# EAGLE board [test] V3.0_2021-01-11_10-16-39.pcb (EAGLE 9.6.2)
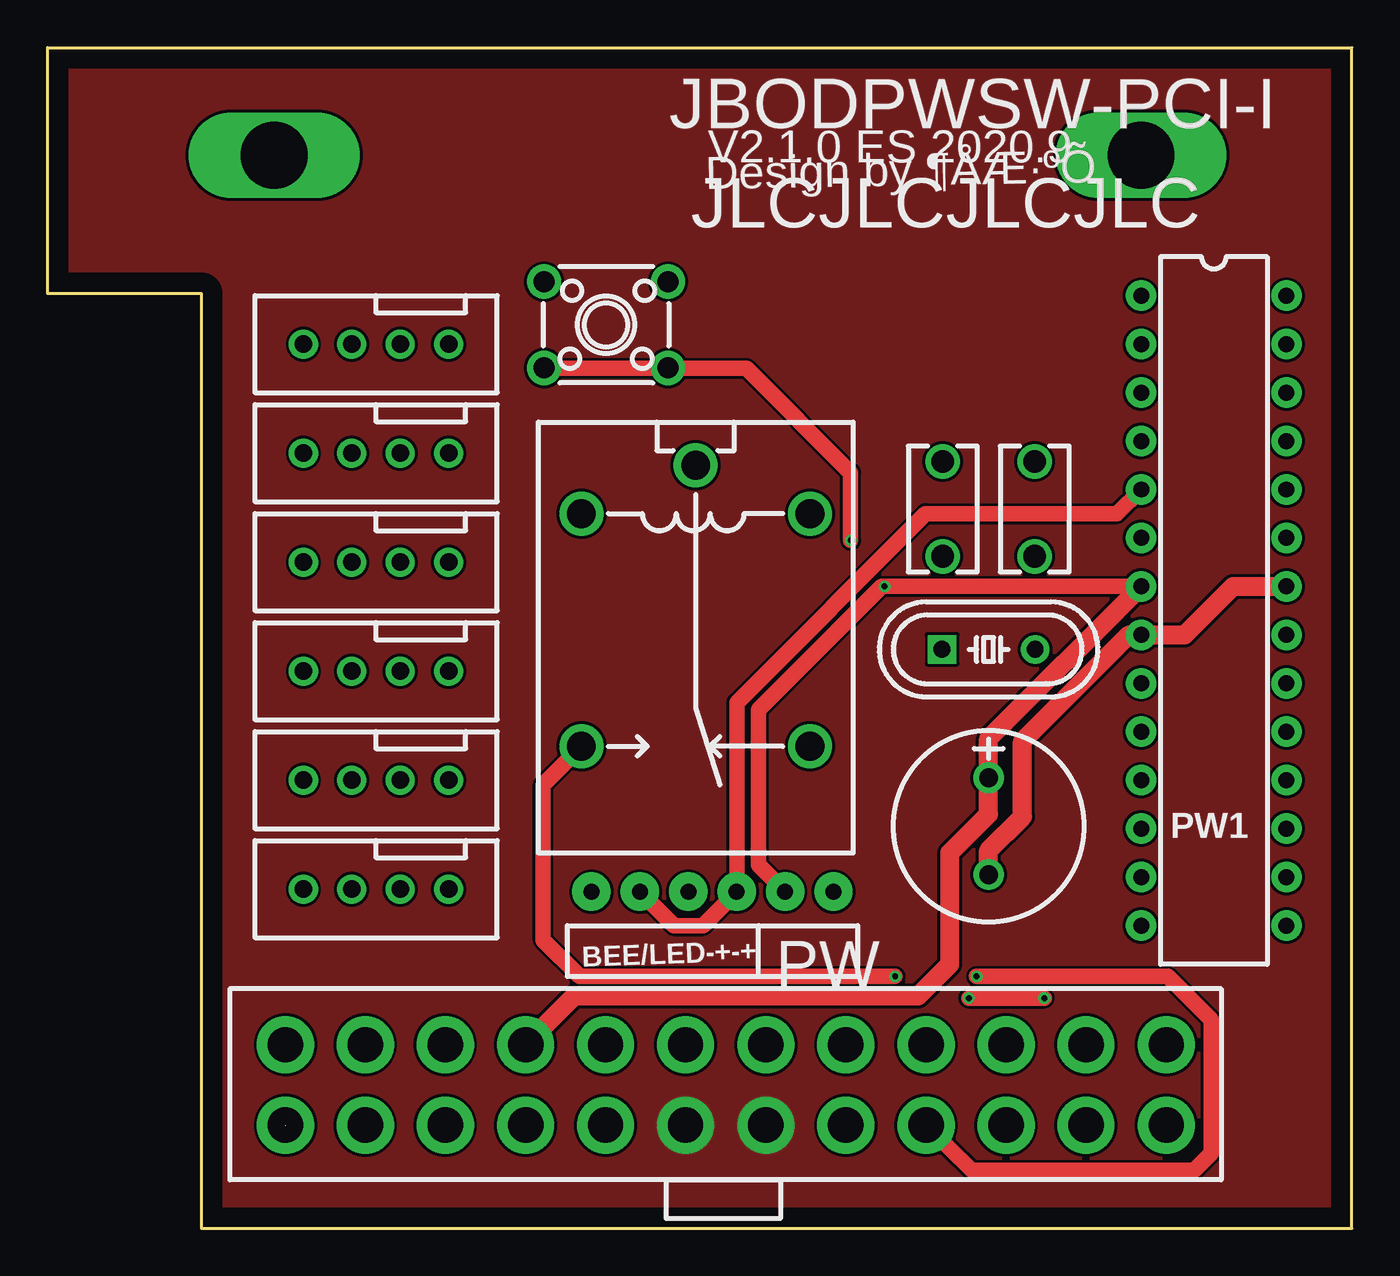
[diagram p0: board, top side]
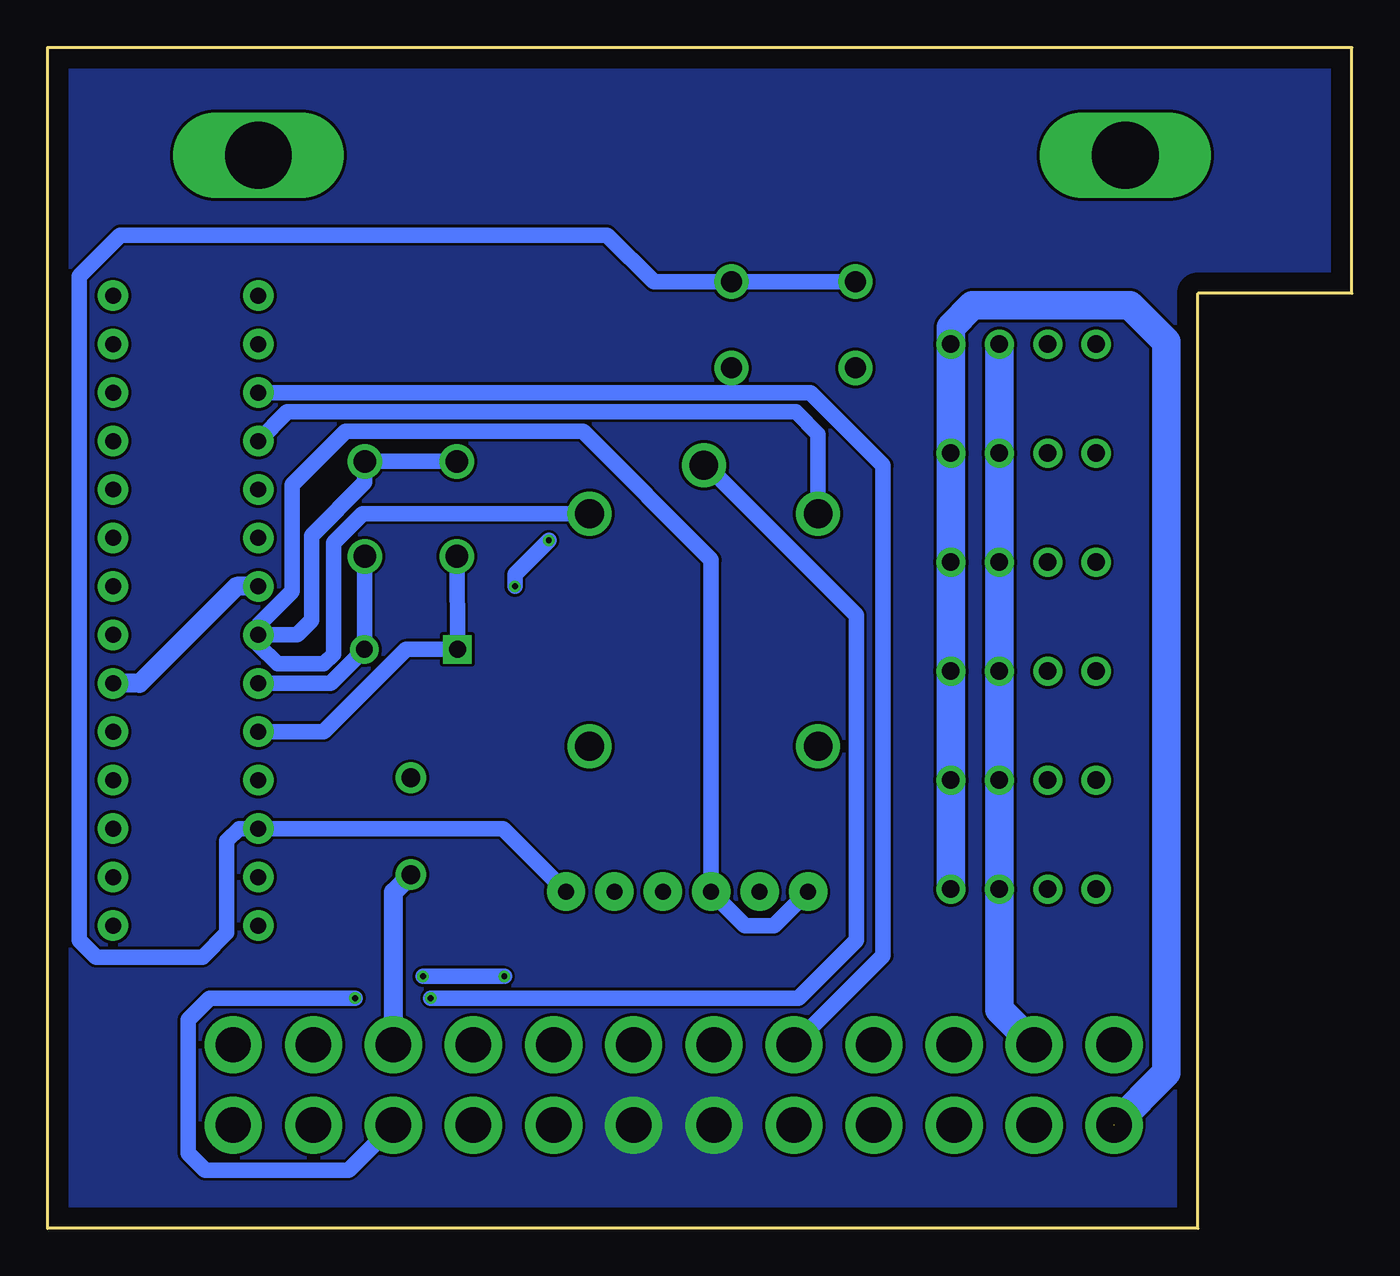
[diagram p1: board, bottom side, seen from below]

Size 68.4 x 61.9 mm. Coordinates in mm from the lower left corner, seen from the top.
Outline: 0,49.02 8.08,49.02 8.08,0 68.4,0 68.4,61.9 0,61.9 0,49.02
Copper layers (1*16): Top 0.035mm / dielectric 1.5mm / Bottom 0.035mm
Design rules "V3.0_2021-01-11_10-16-39": minimum track width 6mil, minimum drill 0.35mm, track to track 6mil, track to pad 6mil, pad to pad 6mil, via to via 6mil, smd to smd 6mil, copper to edge 40mil, drill to drill 6mil, minimum pad ring 0mil, minimum via ring 0mil, stop-mask expansion 4mil, vias tented up to drill 0mil, thermal gap 10mil

## Footprints (pad centres in the part's own frame; a part is rotated, then mirrored left to right if it is on the bottom)
HC-49US_L11.5-W4.5-P4.88_1PRIMARY = drill 0.889 pad 1.499 square: 1 -2.438,0 | drill 0.889 pad 1.499: 2 2.438,0
CAP-TH_L6.5-W3.5-P5.00-D1.2_1PRIMARY = drill 1.194 pad 1.803: 1 -2.489,0; 2 2.489,0
ATX-24PIN_1_1PRIMARY = drill 1.854 pad 2.997: 1 2.87,-7.087; 2 7.087,-7.087; 3 11.278,-7.087; 4 15.469,-7.087; 5 19.685,-7.087; 6 23.876,-7.087; 7 28.092,-7.087; 8 32.283,-7.087; 9 36.474,-7.087; 10 40.691,-7.087; 11 44.882,-7.087; 12 49.073,-7.087; 13 2.87,-2.87; 14 7.087,-2.87; 15 11.278,-2.87; 16 15.469,-2.87; 17 19.685,-2.87; 18 23.876,-2.87; 19 28.092,-2.87; 20 32.283,-2.87; 21 36.474,-2.87; 22 40.691,-2.87; 23 44.882,-2.87; 24 49.073,-2.87
ATMEGA328P-PU_1PRIMARY = drill 0.838 pad 1.6: 1 -16.51,3.81; 2 -13.97,3.81; 3 -11.43,3.81; 4 -8.89,3.81; 5 -6.35,3.81; 6 -3.81,3.81; 7 -1.27,3.81; 8 1.27,3.81; 9 3.81,3.81; 10 6.35,3.81; 11 8.89,3.81; 12 11.43,3.81; 13 13.97,3.81; 14 16.51,3.81; 15 16.51,-3.81; 16 13.97,-3.81; 17 11.43,-3.81; 18 8.89,-3.81; 19 6.35,-3.81; 20 3.81,-3.81; 21 1.27,-3.81; 22 -1.27,-3.81; 23 -3.81,-3.81; 24 -6.35,-3.81; 25 -8.89,-3.81; 26 -11.43,-3.81; 27 -13.97,-3.81; 28 -16.51,-3.81
P:EX787Y177D1381 = drill 3.505 pad 4.496 long: 1 0,0
P:EX79Y79D331 = drill 0.838 pad 2.007: 1 0,0
KEY-TH_4P-L6.0-W6.0-P4.50-LS48PRIMARY = drill 1.092 pad 1.803: 1 -3.251,-2.261; 2 3.251,-2.261; 3 3.251,2.261; 4 -3.251,2.261
CAP-TH_BD10.0-P5.00-D1.0-FD_1PRIMARY = drill 0.991 pad 1.6: 1 -2.54,0; 2 2.54,0
FAN_1PRIMARY = drill 0.914 pad 1.524: 1 2.54,2.54; 2 5.08,2.54; 3 7.62,2.54; 4 10.16,2.54
RELAY-TH_G5LE-14-XX_1PRIMARY = drill 1.499 pad 2.311: 1 -7.366,0; 2 -4.826,-5.994; 3 7.366,-5.994; 4 7.366,5.994; 5 -4.826,5.994

## Placement (x,y rotation side)
16M  HC-49US_L11.5-W4.5-P4.88  [HC-49US_L11.5-W4.5-P4.88_1PRIMARY]  49.35,30.35 0 top
22PF  CAP-TH_L6.5-W3.5-P5.00-D1.2  [CAP-TH_L6.5-W3.5-P5.00-D1.2_1PRIMARY]  46.94,37.72 270 top
23PF  CAP-TH_L6.5-W3.5-P5.00-D1.2  [CAP-TH_L6.5-W3.5-P5.00-D1.2_1PRIMARY]  51.77,37.72 270 top
ATX25  ATX-24PIN_1  [ATX-24PIN_1_1PRIMARY]  61.54,2.54 180 top
DIP28  _  [ATMEGA328P-PU_1PRIMARY]  61.16,32.38 270 bottom
DUMMY1  [P:EX787Y177D1381]  11.88,56.26 0 top
DUMMY2  [P:EX787Y177D1381]  57.35,56.26 0 top
DUMMY3  [P:EX79Y79D331]  31.06,17.65 0 top
DUMMY4  [P:EX79Y79D331]  28.52,17.65 0 top
DUMMY5  [P:EX79Y79D331]  41.22,17.65 0 top
DUMMY6  [P:EX79Y79D331]  36.14,17.65 0 top
DUMMY7  [P:EX79Y79D331]  38.68,17.65 0 top
DUMMY8  [P:EX79Y79D331]  33.6,17.65 0 top
IMPORTED_IMAGE  Comment  [IMPORTED_IMAGE_1PRIMARY]  22.28,59.26 0 top
KEY2  KEY-TH_4P-L6.0-W6.0-P4.50-LS6.5  [KEY-TH_4P-L6.0-W6.0-P4.50-LS48PRIMARY]  29.29,47.37 180 top
REF1  CAP-TH_BD10.0-P5.00-D1.0-FD  [CAP-TH_BD10.0-P5.00-D1.0-FD_1PRIMARY]  49.35,21.08 270 top
U4  FAN  [FAN_1PRIMARY]  10.87,43.82 0 top
U5  RELAY-TH_G5LE-14-XX  [RELAY-TH_G5LE-14-XX_1PRIMARY]  33.99,32.64 270 top
U22  FAN  [FAN_1PRIMARY]  10.87,38.1 0 top
U23  FAN  [FAN_1PRIMARY]  10.87,32.38 0 top
U24  FAN  [FAN_1PRIMARY]  10.87,26.67 0 top
U25  FAN  [FAN_1PRIMARY]  10.87,15.24 0 top
U26  FAN  [FAN_1PRIMARY]  10.87,20.96 0 top

## Library data of the parts
16M 22PF 23PF ATX25 DIP28 DUMMY1-DUMMY8 IMPORTED_IMAGE KEY2 REF1 U4 U5 U22-U26 = V3.0_2021-01-11_10-16-39

## Nets
2: U5.2
5: U5.5
5V0: ATX25.9 REF1.1
12V1: ATX25.11
12V2: ATX25.10
+5V: DIP28.7 DIP28.20 KEY2.3 KEY2.4
A0: DIP28.23
AD1: DIP28.24
AD2: DIP28.25
AD3: DIP28.26
AD4SDA: DIP28.27
AD5SCL: DIP28.28
AGND: DIP28.8 DIP28.22
AREF: DIP28.21
BEE-: ATX25.17
F5V: U4.3 U22.3 U23.3 U24.3 U25.3 U26.3
FGND: ATX25.24 U4.4 U22.4 U23.4 U24.4 U25.4 U26.4
GND: ATX25.18 ATX25.19
IO0: DIP28.2
IO1: ATX25.8 DIP28.3
IO2: DIP28.4
IO3: DIP28.5
IO4: DIP28.6
IO5: DIP28.11
IO7: DIP28.13
IO9: DIP28.15
MISO: DIP28.18
MOSI: DIP28.17
N00: ATX25.1
N01: ATX25.13
N02: ATX25.2
N03: ATX25.14
N04: ATX25.4
N05: ATX25.5
N06: ATX25.6
N07: ATX25.20
N08: ATX25.21
N09: ATX25.22
N11: ATX25.23
N12: ATX25.12
N13: U5.4
N15: ATX25.7
PW: DIP28.12 KEY2.1 KEY2.2
PW1: ATX25.16 U5.3
PW2: ATX25.15 U5.1
RE: DIP28.14
RESET: DIP28.1
S$3934: ATX25.3 REF1.2
S$4221: 22PF.1 23PF.1
S$4223: 16M.1 22PF.2
SCK: DIP28.19
SS: DIP28.16
XTAL1: 16M.2 23PF.2 DIP28.9
XTAL2: DIP28.10

## Tracks (layer width: path | path; a pad name or v marks a point on that pad's centre or on a via)
2
  Bottom 0.8: U5.2 27.99,41.63 29.16,42.8 55.83,42.8 57.35,41.27
5
  Bottom 0.8: U5.5 51.89,37.46 53.42,35.94 53.42,30.1 53.92,29.59 56.34,29.59 57.35,30.61 57.35,31.11
5V0
  Top 1: ATX25.9 27.63,12.19 45.67,12.19 47.32,13.84 47.32,19.68 49.35,21.72 REF1.1 49.35,25.65 57.35,33.65
+5V  (via drill 0.3 pad 0.61)
  Top 0.8: DIP28.7 v43.89,33.65 43.76,33.65 37.29,27.18 37.29,19.05 38.68,17.65 | v42.11,36.07 42.11,39.62 36.65,45.08 32.56,45.08 | KEY2.4 32.56,45.08 | 32.56,45.08 26.06,45.08 KEY2.3
  Bottom 0.8: v42.11,36.07 43.89,34.29 v43.89,33.65
  Bottom 1: DIP28.7 58.5,33.65 63.58,28.57 DIP28.20
-5V
  Bottom 0.8: 57.35,31.11 57.35,31.62 55.57,33.4 55.57,38.99 52.78,41.78 40.33,41.78 33.6,35.05 33.6,17.65 31.83,15.87 30.3,15.87 28.52,17.65
AGND
  Top 1: DIP28.22 62.18,33.65 59.64,31.11 DIP28.8 56.72,31.11 51.13,25.53 51.13,21.59 49.35,19.81 49.35,18.54
F5V
  Bottom 1.5: U4.3 U22.3 U23.3 U24.3 U26.3 U25.3 18.49,11.46 16.66,9.63
FGND  (1 unrouted)
  Bottom 1.5: 12.45,5.41 9.73,8.15 9.73,46.48 11.63,48.39 19.89,48.39 21.03,47.24 U4.4 U22.4 U23.4 U24.4 U26.4 U25.4
GND
  pour Top (no thermals): 31.19,7.62 31.19,3.17 31.31,3.05 35.63,3.05 35.76,3.17 35.76,7.11 35.38,7.49
  pour Top (no thermals): 0.2,61.72 68.27,61.72 68.27,0.13 8.2,0.13 8.2,49.15 0.2,49.15
  pour Bottom (no thermals): 31.31,7.49 35.63,7.49 35.63,3.17 31.57,3.17 31.44,3.3
  pour Bottom (no thermals): 0.2,61.72 68.27,61.72 68.27,0.13 8.2,0.13 8.2,49.15 0.2,49.15
IO1
  Bottom 0.8: ATX25.8 24.59,14.3 24.59,40 28.4,43.81 DIP28.3
LED
  Top 0.8: 57.35,38.73 56.08,37.46 46.05,37.46 36.14,27.56 36.14,17.65 34.37,15.87 32.84,15.87 31.06,17.65
PW
  Bottom 0.8: KEY2.2 KEY2.1 36.6,49.63 39.06,52.07 64.59,52.07 66.75,49.91 66.75,15.11 65.86,14.22 60.27,14.22 59,15.49 59,20.32 58.37,20.95 DIP28.12 44.53,20.95 41.22,17.65
PW1  (via drill 0.3 pad 0.61)
  Top 0.8: 46.05,5.41 ATX25.16 48.46,3.05 60.15,3.05 61.04,3.94 61.04,10.92 58.75,13.21 v48.72,13.21 | v44.45,13.21 27.89,13.21 25.98,15.11 25.98,23.27 U5.3
  Bottom 0.8: v44.45,13.21 v48.72,13.21
PW2  (via drill 0.3 pad 0.61)
  Top 0.8: v48.31,12.06 v52.27,12.06
  Bottom 0.8: U5.1 33.86,40 25.98,32.13 25.98,15.11 29.03,12.06 v48.31,12.06 | v52.27,12.06 59.89,12.06 61.04,10.92 61.04,3.94 60.15,3.05 52.63,3.05 ATX25.15
S$3934
  Bottom 1: REF1.2 50.27,17.63 ATX25.3
S$4221
  Bottom 0.8: 22PF.1 23PF.1 51.76,39.12 54.56,36.32 54.56,31.88 55.32,31.11 57.35,31.11
S$4223
  Bottom 0.8: 16M.1 22PF.2
XTAL1
  Bottom 0.8: 23PF.2 51.76,30.38 16M.2 53.57,28.57 DIP28.9
XTAL2
  Bottom 0.8: DIP28.10 53.92,26.03 49.61,30.35 46.91,30.35

## Text on the board
tPlace: JBODPWSW-PCI-I | V2.1.0 ES 2020.9 | Design by ¶ÅÆ·ºÕ | JLCJLCJLCJLC | PW1 | BEE/LED-+-+ | PW